# Altium PCB Flight_sensor.PcbDoc
Units mil, origin at the board's own origin, x right, y up, seen from the top; angles counter-clockwise.
Board outline 6000 x 4000 mil, 2 copper layers (Top Layer, Bottom Layer); 73 components, 80 nets, 324 pads, 77 vias.
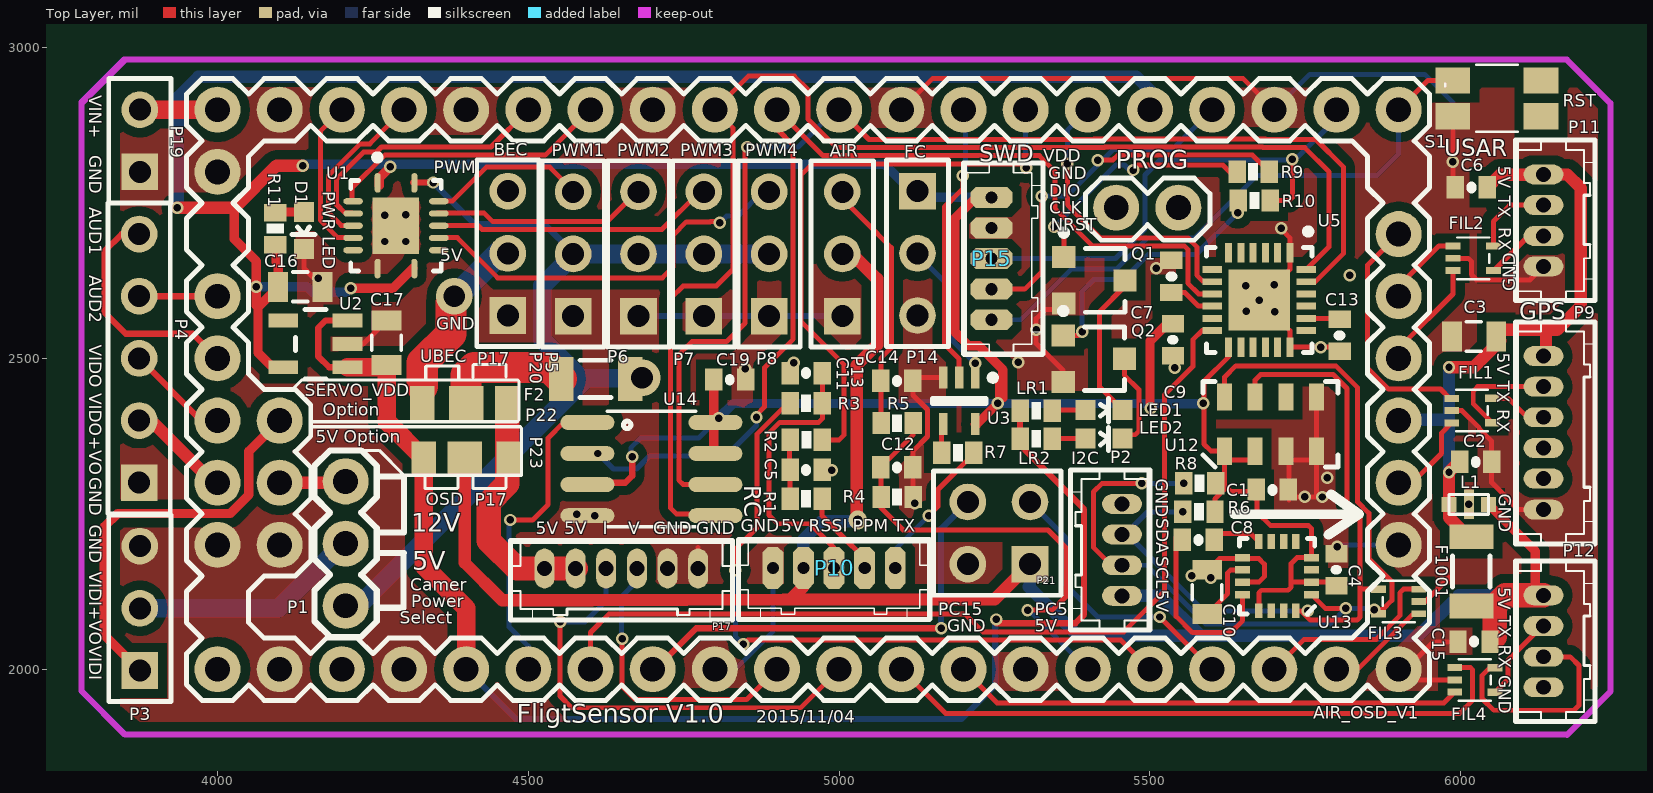
[diagram p0: Top Layer view]
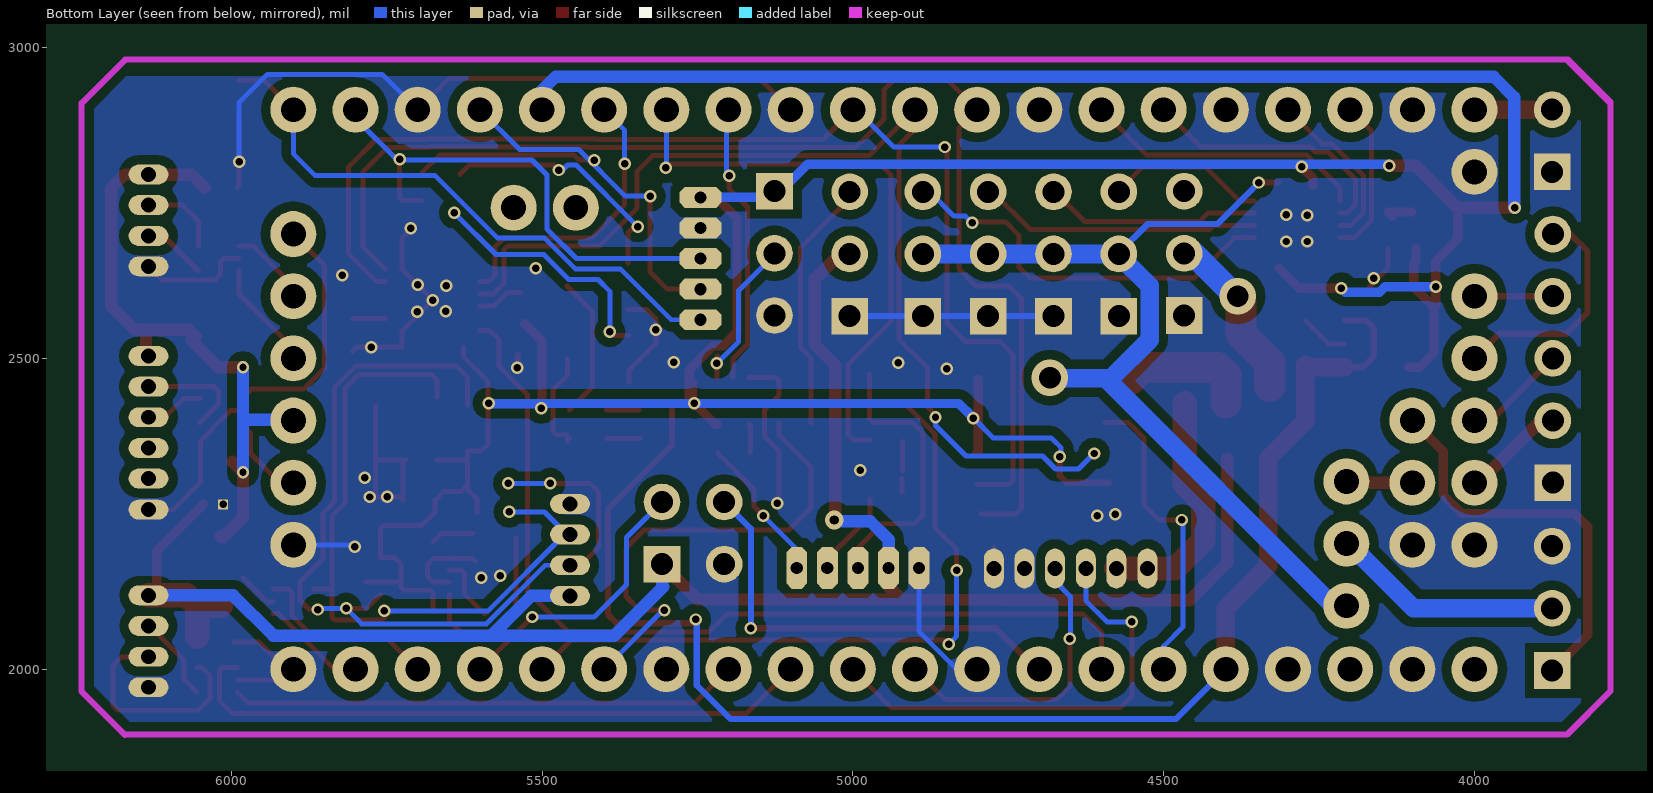
[diagram p1: Bottom Layer view, seen from below]

## Layer stack, top to bottom
Top Layer: signal copper 1.4
Dielectric: dielectric 12.6, FR-4, Dk 4.8
Bottom Layer: signal copper 1.4

## Board outline
2085,1010 8085,1010 8085,5010 2085,5010

## Design rules (kind name [scope] priority, off if disabled: settings)
Clearance Clearance_1 [InPolygon] p1: gap=15
Clearance [All] p2: gap=5
ComponentClearance [All] p1 off: gap=10 collisioncheckmode=3 verticalgap=10 showdistances=FALSE
MinimumSolderMaskSliver [All] p1 off: minsoldermaskwidth=10
PlaneConnect [All] p1: planeconnectstyle=Direct reliefexpansion=20 reliefentries=4 reliefconductorwidth=10 reliefairgap=10
PolygonConnect [All] p1: connectstyle=Direct reliefconductorwidth=10 reliefentries=4 polygonreliefangle="90 Angle"
RoutingVias [All] p1: holewidth=28 width=50 viastyle="Through Hole" minholewidth=28 minwidth=50 maxholewidth=28 maxwidth=50
SilkToSilkClearance [All] p1 off: silktosilkclearance=10
SilkscreenOverComponentPads [All] p1 off: minsilkscreentomaskgap=10
SolderMaskExpansion [All] p1: expansion=4
TestPointUsage [All] p1: valid=0 allowmultiple=FALSE
Testpoint [All] p1: side=15 testpointundercomponent=TRUE minsize=40 maxsize=100 preferedsize=60 minholesize=0 maxholesize=40 preferedholesize=32 testpointgrid=1 style=1023 order=0123456789
Width [All] p1: maxlimit=100 minlimit=5 preferedwidth=7
19 further rules are at their usual default settings.

## Components (designator, comment, footprint, x,y, rotation, side; value= is the part's Value field where it differs from the comment)
AIR_OSD_V1 "AIR_OSD_V1" AIR_OSD_CON 4000,2000 r0 top locked
C1 "100nF" 0402-CAP 5697,2289 r180 top
C2 "10nf" 0402-CAP 6024,2334 r180 top
C3 "10uf" 0805 6021,2535 r0 top
C4 "100nF" 0402-CAP 5800,2160 r90 top
C5 "10nf" 0402-CAP 4947,2321 r180 top
C6 "10nf" 0402-CAP 6017,2775 r180 top
C7 "100nF" 0402-CAP 5534,2632 r270 top
C8 "220nF" 0402-CAP 5578,2208 r180 top
C9 "100nF" 0402-CAP 5537,2530 r90 top
C10 "4.7uF" 0805 5592,2124 r90 top
C11 "10nf" 0402-CAP 4946.99,2476 r0 top
C12 "10nf" 0402-CAP 5093,2325 r180 top
C13 "100nF" 0402-CAP 5805,2537 r90 top
C14 "10nf" 0402-CAP 5093,2464 r180 top
C15 "100nF" 0402-CAP 6021,2044 r0 top
C16 "4.7UF" 0805 4133,2615 r0 top
C17 "1uF" 0805 4272,2525 r90 top
C19 "100nF" 0402-CAP 4824,2466 r180 top
D1 "BLUE-C" LED-0603 4139,2706 r180 top (schematic designator LED1)
F2 "0ZCA0035FF2G" PTC-1206 4608,2467 r0 top (schematic designator F1001)
F1001 "0ZCA0035FF2G" PTC-1206 6017,2157 r90 top
FIL1 "IP4256CZ5-W,115" SOT-665 6018,2416 r0 top
FIL2 "IP4256CZ5-W,115" SOT-665 6020,2661 r0 top
FIL3 "IP4256CZ5-W,115" SOT-665 5900,2109 r180 top
FIL4 "IP4256CZ5-W,115" SOT-665 6022.57,1982.87 r0 top
L1 "KNH16C104DA5TS" KYOCERA-KNH16-DA 6013,2265.25 r180 top
LED1 "BLUE-C" LED-0603 5426,2417 r270 top
LED2 "BLUE-C" LED-0603 5426,2371 r270 top
LR1 "470" 0402-RES 5317,2416 r180 top
LR2 "470" 0402-RES 5317,2371 r180 top
P1 "Camera Power Switch" 3X1-NS 4206,2202 r90 top
P2 "DF13-4P-1.25DSA" DF13-4P-1.25DSA 5455,2191.82 r90 top
P3 "Camera Connect" HDR1X3 3875,1998 r90 top
P4 "Wreless _Video" HDR1X5 3874,2300 r90 top
P5 "Header 3" HDR1X3 4572.1,2568 r90 top
P6 "Header 3" HDR1X3 4677.2,2568 r90 top
P7 "Header 3" HDR1X3 4782.3,2568 r90 top
P8 "Header 3" HDR1X3 4887.4,2568 r90 top
P9 "GPS/DF13-6P-1.25DSA" PIXHAWK2_DF13-6P-1.25DSA 6133,2380.7 r270 top
P10 "CONN_5" DF13-5P-1.25DSA 4991.79,2163 r180 top
P11 "Console/DF13-4P-1.25DSA" DF13-4P-1.25DSA 6133,2722 r270 top
P12 "console" DF13-4P-1.25DSA 6133,2045 r270 top
P13 "CONN_3" HDR1X3 5005,2568 r90 top
P14 "Header 3" HDR1X3 5126,2769 r270 top
P15 "SWD" DF13-5P-1.25DSA 5245,2660.58 r270 top
P17 "DF13-6P-1.25DSA" PIXHAWK2_DF13-6P-1.25DSA 4650.18,2162 r180 top
P19 "Header 2" HDR1X2 3875,2800 r90 top
P20 "Header 3" HDR1X3 4467,2569 r90 top
P21 "DF13-4P-1.25DSA" HDR1X4 5007,2169 r180 top
P22 "Header 3" 0402-S 4397.7,2428 r0 top
P23 "Header 3" 0402-S 4400,2339 r180 top
Q1 "2N7002" 2N7002 5411,2627 r270 top
Q2 "2N7002" 2N7002 5410,2501 r270 top
R1 "100" 0402-RES 4947,2274 r180 top
R2 "1K" 0402-RES 4946.99,2369 r0 top
R3 "100" 0402-RES 4947,2428 r180 top
R4 "33K" 0402-RES 5092.99,2277 r0 top
R5 "17K" 0402-RES 5093,2396 r0 top
R6 "4.7K" 0402-RES 5579,2253 r180 top
R7 "100" 0402-RES 5191,2348 r180 top
R8 "4.7K" 0402-RES 5580,2299 r180 top
R9 "1K" 0402-RES 5666,2800 r0 top
R10 "1K" 0402-RES 5668,2754 r180 top
R11 "470" 0402-RES 4093,2709 r270 top
S1 "RESET" EVQP7J01K 6058,2918 r0 top
U1 "TXB0104GRYQFN" RGY(S-PVQFN-N14) 4287.1,2713.37 r270 top
U2 "MIC5219-3.3V" SOT23-5 4157.81,2523 r90 top
U3 "sn74lvc1g86" "DCK (R-PDSO-G5)" 5193,2431.6 r270 top
U5 "MPU-6000" MPU6000 5675.79,2593.84 r270 top
U12 "MS5611-01BA" MS5611-01BA 5694,2394 r90 top
U13 "HMC5883L" LPCC16 5705,2150 r180 top
U14 "FM25V01" SO08 4698,2322 r270 top

## Footprints (in the part's own frame and the unit in brackets; to place one, negate y for a bottom-side part, rotate by r counter-clockwise, add the part's x,y. Pads: shape width x height; smd on the part's side, far side on the other; paste and mask are expansions set on the pad)
2N7002 [mm]
  rect 0.9x0.95 smd: 1(-0.909,-1.259) 2(0.041,1.241) 3(0.991,-1.259)
  silkscreen extent -2.03,-1.38 1.34,1.24
3X1-NS [mil] "2X3-NS"
  round 74 hole 40: 1(-100,0) 2(0,0) 3(100,0)
  silkscreen extent -150,-50 150,50
0402-CAP [mil] "0402-CAP"
  rect 28x36 smd: 1(-25.59,0) 2(26,0)
  silkscreen extent 0,-1 0,2
0402-RES [mil] "0402-RES"
  rect 28x36 smd: 1(-25.59,0) 2(26,0)
  silkscreen extent -8,-14 8,14
0402-S [mm] "0402-CAP"
  rect 1x1.4 smd: 1(-1.735,0) 3(1.735,0)
  rect 1.4x1.4 smd: 2(0.058,0)
0805 [mil] "0805"
  rect 32x48 smd: 1(-35.43,0) 2(36,0)
  silkscreen extent -12,-24 12,24
AIR_OSD_CON [mil] "100MIL"
  round 74 hole 40: 1(0,0) 2(100,0) 3(200,0) 4(300,0) 5(400,0) 6(500,0) 7(600,0) 8(700,0) 9(800,0) 10(900,0) 11(1000,0) 12(1100,0) 13(1200,0) 14(1300,0) 15(1400,0) 16(1500,0) 17(1600,0) 18(1700,0) 19(1800,0) 20(1900,0) 21(1900,200) 22(1900,300) 23(1900,400) 24(1900,500) 25(1900,600) 26(1900,700) 27(1900,900) 28(1800,900) 29(1700,900) 30(1600,900) 31(1500,900) 32(1400,900) 33(1300,900) 34(1200,900) 35(1100,900) 36(1000,900) 37(900,900) 38(800,900) 39(700,900) 40(600,900) 41(500,900) 42(400,900) 43(300,900) 44(200,900) 45(100,900) 46(0,900) 47(0,800) 48(0,600) 49(0,500) 50(0,400) 51(0,300) 52(0,200) 53(100,400) 54(100,300) 55(100,200) 56(1445.67,742.52) 57(1545.67,742.52)
  silkscreen extent -50,-50 1950,950
"DCK (R-PDSO-G5)" [mm] "sn74lvclg86"
  rect 0.9x0.35 smd: 1(-0.95,0.65) 2(-0.95,0) 3(-0.95,-0.65) 4(0.95,-0.65) 5(0.95,0.65)
  silkscreen extent -1.07,-1.1 0.1,1.5, body extent -0.7,-1.07 0.7,1.08, height 1.1
DF13-4P-1.25DSA [mil] "DF13-4P-1.25DSA"
  oval 32x64 hole 24: 1(-73.82,0) 2(-24.61,0) 3(25,0) 4(74,0)
  silkscreen extent -132,-47 132,84
DF13-5P-1.25DSA [mm]
  oct 0.856x1.711 hole 0.5: 1(-2.5,0) 2(-1.25,0) 3(0,0) 4(1.25,0) 5(2.5,0)
  silkscreen extent -3.97,-1.2 3.98,2.13
EVQP7J01K [mil] "EVQP7J01K"
  rect 56x42 smd: A1(-70.87,29) A2(71,29) B3(-70.87,-28.54) B4(71,-28.54)
  silkscreen extent -83,-53 34,54
HDR1X2 [mm] "Connector; Header; 2 Position"
  rect 1.5x1.5 hole 0.9: 1(0,0)
  round 1.5 hole 0.9: 2(2.54,0)
  silkscreen extent -1.27,-1.27 3.81,1.27
HDR1X3 [mm] "Connector; Header; 3 Position"
  rect 1.5x1.5 hole 0.9: 1(0,0)
  round 1.5 hole 0.9: 2(2.54,0) 3(5.08,0)
  silkscreen extent -1.27,-1.27 6.35,1.27
HDR1X4 [mm] "Connector; Header; 5 Position"
  rect 1.5x1.5 hole 0.9: 1(-7.62,0)
  round 1.5 hole 0.9: 2(-5.08,0) 3(-7.62,-2.54) 4(-5.08,-2.54)
  silkscreen extent -8.89,-3.81 -3.68,1.27
HDR1X5 [mm] "Connector; Header; 5 Position"
  rect 1.5x1.5 hole 0.9: 1(0,0)
  round 1.5 hole 0.9: 2(2.54,0) 3(5.08,0) 4(7.62,0) 5(10.16,0)
  silkscreen extent -1.27,-1.27 11.43,1.27
KYOCERA-KNH16-DA [mil] "KYOCERA-KNH16-DA"
  rect 24x24 smd: P$1(-31.5,0) P$2(32,0)
  rect 16x16 smd: P$3(0,-15.75) P$4(0,16)
  rect 16x16 hole 12: P$5(0,0)
  silkscreen extent -31,-16 32,16
LED-0603 [mil] "LED-0603"
  rect 32x32 smd: A(0,-29.53) C(0,30)
  silkscreen extent -18,-6 19,7
LPCC16 [mil] "LPCC16"
  rect 24x12 smd: 1(-55.12,30) 2(-55.12,10) 3(-55.12,-9.84) 4(-55.12,-29.53) 9(56,-29.53) 10(56,-9.84) 11(56,10) 12(56,30)
  rect 12x24 smd: 5(-29.53,-55.12) 6(-9.84,-55.12) 7(10,-55.12) 8(30,-55.12) 13(30,56) 14(10,56) 15(-9.84,56) 16(-29.53,56)
  silkscreen extent -60,-60 61,61
MPU6000 [mm] "QFN, 24"
  rect 0.8x0.28 smd: 1(-1.925,1.25) 2(-1.925,0.75) 3(-1.925,0.25) 4(-1.925,-0.25) 5(-1.925,-0.75) 6(-1.925,-1.25) 13(1.925,-1.25) 14(1.925,-0.75) 15(1.925,-0.25) 16(1.925,0.25) 17(1.925,0.75) 18(1.925,1.25)
  rect 0.28x0.8 smd: 7(-1.25,-1.925) 8(-0.75,-1.925) 9(-0.25,-1.925) 10(0.25,-1.925) 11(0.75,-1.925) 12(1.25,-1.925) 19(1.25,1.925) 20(0.75,1.925) 21(0.25,1.925) 22(-0.25,1.925) 23(-0.75,1.925) 24(-1.25,1.925)
  rect 2.5x2.5 smd: 25(0,0)
  silkscreen extent -2.92,-2.15 2.15,2.15, body extent -2,-2 2,2, height 0.95
MS5611-01BA [mil] "MS5611-01BA"
  rect 44x24 smd: 1(-43.31,74) 2(-43.31,25) 3(-43.31,-24.61) 4(-43.31,-73.82) 5(44,-73.82) 6(44,-24.61) 7(44,25) 8(44,74)
  silkscreen extent -69,-108 69,109
PIXHAWK2_DF13-6P-1.25DSA [mil] "PIXHAWK2_DF13-6P-1.25DSA"
  oval 32x64 hole 24: 1(-123.03,0) 2(-73.82,0) 3(-24.61,0) 4(25,0) 5(74,0) 6(124,0)
  silkscreen extent -181,-47 182,84
PTC-1206 [mil] "PTC-1206"
  rect 40x71 smd: 1(-55.12,0) 2(56,0)
  silkscreen extent -25,-30 25,30
RGY(S-PVQFN-N14) [mm] "QFN, 14-Leads, Body 3.7x3.7mm (max), Pitch 0.50mm, Pitch1 1.50mm, IPC Medium Density"
  oval 0.8x0.25 smd: 1(-1.75,-0.75) 7(1.75,-0.75) 8(1.75,0.75) 14(-1.75,0.75)
  oval 0.25x0.8 smd: 2(-1,-1.75) 3(-0.5,-1.75) 4(0,-1.75) 5(0.5,-1.75) 6(1,-1.75) 9(1,1.75) 10(0.5,1.75) 11(0,1.75) 12(-0.5,1.75) 13(-1,1.75)
  rect 2.3x1.9 smd: 15(0,0)
  silkscreen extent -2.92,-1.85 1.85,1.85, body extent -1.83,-1.83 1.83,1.83, height 1
SO08 [mil] "SO08"
  oval 24x87 smd: 1(-75,-103) 2(-25,-103) 3(25,-103) 4(75,-103) 5(75,103) 6(25,103) 7(-25,103) 8(-75,103)
  silkscreen extent -93,-71 93,71
SOT23-5 [mil] "SOT23-5"
  rect 22x48 smd: 1(-37.4,-51.19) 2(0,-51.19) 3(38,-51.19) 4(38,52) 5(-37.4,52)
  silkscreen extent -56,-17 56,32
SOT-665 [mm] "NXP SOT665"
  rect 0.6x0.28 smd mask+0.076: 1(-0.825,0.5) 2(-0.825,0) 3(-0.825,-0.5)
  rect 0.6x0.3 smd mask+0.076: 4(0.825,-0.5) 5(0.825,0.5)
  silkscreen extent -0.65,-0.85 0.65,0.85, body extent -0.65,-0.85 0.65,0.85, height 0.6

## Part data
AIR_OSD_V1: library part Component_1
C1 C4 C7 C8 C9 C13 C16 C17: library part CAP0402-CAP
C2 C3 C5 C6 C11 C12 C14 C15: library part Cap, "Capacitor"
C10: library part CAP0805
C19: library part CAP0402, "<b>Capacitor</b> / Standard 0603 ceramic capacitor, and 0.1\" leaded capacitor."
D1 LED1 LED2: library part LED
F2 F1001: library part PTCSMD, "<b>Resettable Fuse PTC</b> / Resettable Fuse. Spark Fun Electronics SKU : COM-08357"
FIL1 FIL2 FIL3 FIL4: library part "RF Filter 100R 30pF", "IP4256CZ5-W,115 2 channel, 100R, 30pF, RF ESD Filter"
L1: "Kyocera KNH16C104DA5TS EMI filter"
LR1 LR2 R1 R2 R3 R4 R5 R6 R7 R8 R9 R10 R11: library part Res1, "Resistor"
P1 P3 P4 P13: library part "Header 3", "Header, 3-Pin"
P2 P11 P12: library part "Header 4", "Header, 4-Pin"
P5 P6 P7 P8 P14 P20 P22 P23: "Header, 3-Pin"
P9 P17: library part "Header 6", "Header, 6-Pin"
P10 P15: library part "Header 5", "Header, 5-Pin"
P19: "接插件"
Q1 Q2: library part IRF840, "CQ-IRF840"
S1: library part SW-PB, "Switch"
U1: library part TXB0104UQFN
U2: library part V_REG_LDOSMD
U3: library part 74LS86
U5: library part MPU-3000
U14: "<b>FM25V01 128Kb Serial 3V F-RAM Memory</b>"

## Via types
v1: diameter 20, hole 12, Top Layer to Bottom Layer, 74 vias
v2: diameter 59, hole 35, Top Layer to Bottom Layer, 2 vias
v3: diameter 30, hole 15, Top Layer to Bottom Layer, 1 vias

## Nets (pads, with @x,y where several pads share a name; then routed paths per layer and width w, separated by ;. In a path a pad name is that pad's centre, name@x,y a point inside that pad or via, vN(x,y) a via of type N, cw(c..) or ccw(c..) an arc to the next point about the centre after c; other vN are vias at no path point)
5-9V_EXTERNAL: P20.2 P22.1 | length 268.8
  Top Layer w50: P22.1@4329.41,2455 4329.41,2493.41 4375.3,2539.3 v2@4375.3,2590.18
  Bottom Layer w39.37: v2(4381,2600) 4384,2600 4453,2669 P20.2
5V_SERVO: F2.2 P1.1 P5.2 P6.2 P7.2 P8.2 U1.14 | length 1494.1
  Top Layer w10: U1.14@4314.53,2782.9 v1(4346.9,2782.9)
  Bottom Layer w10: v1(4346.9,2782.9) 4413.8,2716 4526,2716 P5.2@4573.05,2668.95
  Bottom Layer w30: P1.1 4209,2105 4230,2105 4593,2468 ; P5.2 4572.1,2666.1 4522.57,2616.57 4522.57,2598.67 4522.57,2530.19 4584.76,2468 4593,2468 ; P5.2@4574,2668 P6.2 ; v2(4683,2469) 4682,2468 4593,2468 ; P6.2@4685.8,2668 4786.6,2668 P8.2
+3.3V: AIR_OSD_V1.31 C1.2 C4.1 C9.2 C16.1 C19.2 P14.1 P15.1 R6.1 R8.1 R11.2 U1.1 U1.8 U2.5 U3.5 U5.13 U12.1 U12.2 U13.2 U13.4 U13.13 U14.3 U14.7 U14.8 | length 6520
  Top Layer w8: v1(5255,2428) 5255,2463 ; R6.1@5604.59,2252 5604.59,2274 5620,2289.41 5620,2296 ; U5.13 5626.57,2502.57 5587,2463 5587,2362 5598.31,2350.69 U12.1 U12.1@5620,2336.69 ; U12.2@5669,2336.69 U12.1@5620,2336.69 ; U13.13 5675,2123 5679,2127 5722,2127 5727,2132 5727,2140 ; C4.1@5783.59,2140 U13.2 5727,2140 ; 5620,2296 U12.1@5620,2336.69 ; 5620,2296 5630,2286 5658,2286 5672,2272 5672,2253 5694,2231 5755.12,2231 5760.12,2226 U13.4 5736.53,2179.53 5727,2170 5727,2140
  Top Layer w10: U14.3@4588,2300 4656,2300 4667,2311 v1(4667,2342)
  Top Layer w15: 4027,2742 4027,2692 4062.5,2656.5 v1(4062.5,2615) 4062.5,2584.93 4065,2582.43 ; R11.2@4094,2677 4094,2655 4097.57,2651.43 C16.1 4065,2582.43 ; U2.5 4088.4,2485.6 4065,2509 4065,2582.43 ; v1(4137,2810) v1@4139,2808 ; v1(4214,2613) 4282.43,2613 U1.8@4314.53,2645.1 ; U1.1@4260,2778 4260,2790 v1(4278,2808) ; U14.7@4798,2349 C19.2 ; U14.7@4799,2349 U14.7 ; U3.5 5221.2,2394.2 v1(5255,2428) ; P15.1 5239,2765 5226,2765 5186.43,2725.43 5186.43,2542.57 5208.5,2520.5 5224.83,2520.5 5263.41,2481.93 5263.41,2463 5263.41,2436.41 ; v1@5500,2428 5500,2528 C9.2@5528,2556
  Top Layer w20: v1(3935,2742) 4027,2742 4095,2810 v1(4137,2810)
  Bottom Layer w8: v1(4667,2342) 4665,2344 4665,2356 4681,2372 4774,2372 v1(4806,2404)
  Bottom Layer w15: v1(4062.5,2615) 4144.18,2615 4152.68,2606.5 4207.5,2606.5 v1(4214,2613) ; v1(4137,2810) 4137,2812 4137.5,2812.5 5072.5,2812.5 5126,2759 P15.1 ; v1(4806,2404) 4829.5,2427.5 5499.5,2427.5 v1@5501,2426 ; v1@5501,2427 v1@5586,2427
  Bottom Layer w20: v1(3935,2742) 3936,2743 3936,2920 3969,2953 5478,2953 5500,2931 AIR_OSD_V1.31
  other v1: 5501,2420 5586,2428
+5V: C15.2 F1001.1 L1.P$1 P2.1 P10.4 P12.1 P13.2 P21.1 P23.2 | length 3249.7
  Top Layer w15: L1.P$1 6120,2189.75 6120,2131.82 P12.1
  Top Layer w20: P23.2 4397.7,2171.3 4457.89,2111.11 4601.91,2111.11 ; 4569,2111 4601.91,2111.11 ; 4921.88,2112.18 P10.4@4942.57,2133 ; P13.2@4994,2668 5021,2668 5061,2628 5061,2521.95 5028,2488.95 v3@5028,2240 ; P21.1 5250.14,2112.14 4910.65,2112.14 4601.91,2111.11
  Top Layer w39.37: F1001.1 6054.88,2101.88 ; C15.2@6054.88,2051.88 6054.88,2101.88 ; P12.1 6071.82,2118.82 6054.88,2101.88
  Bottom Layer w20: P10.4 4942.57,2208.57 4972,2238 5029,2238 5030,2239 v3(5030,2240) ; 5304.82,2132.82 5383.64,2054 5932,2054 5996.82,2118.82 P12.1 ; 5307,2135 P21.1 ; P2.1 5517.36,2118 5581,2054.36
ADC_I: AIR_OSD_V1.11 P17.4 | length 741.7
  Top Layer w8: v1(4551,2076) 4551,1957 4570,1938 4938,1938 AIR_OSD_V1.11
  Bottom Layer w8: v1(4551,2076) 4591,2076 4625.18,2110.18 P17.4
ADC_RSSI: AIR_OSD_V1.16 R3.2 | length 1109.8
  Top Layer w8: v1(4833,2159) 4833,2193 4868,2228 4868,2378.71 4917.29,2428 R3.2 ; v1@4847,2041 4853,2047 5453,2047 AIR_OSD_V1.16
  Bottom Layer w8: v1(4833,2159) 4833,2053 v1(4846,2040) ; AIR_OSD_V1.16@5498,1998 AIR_OSD_V1.16
ADC_V: AIR_OSD_V1.10 P17.3 | length 478.7
  Top Layer w8: v1(4651,2049) 4651,1972 4672,1951 4851,1951 AIR_OSD_V1.10
  Bottom Layer w8: v1(4651,2049) 4650,2050 4650,2117 4674.79,2141.79 P17.3
AIR_SPD: AIR_OSD_V1.15 C12.2 R4.1 R5.2 | length 767.2
  Top Layer w8: R4.1@5067,2277 C12.2 5119,2377 R5.2 ; R4.1 5067.4,2259.6 5103,2224 5336,2224 5365,2195 5365,2117 5343,2095 v1(5303,2095)
  Bottom Layer w8: v1@5304,2096 AIR_OSD_V1.15
AUDIO_1: AIR_OSD_V1.49 P4.5 | length 378.2
  Top Layer w10: P4.5 3846,2700 3818,2672 3818,2574 3852.47,2539.53 3960.47,2539.53 AIR_OSD_V1.49
AUDIO_2: AIR_OSD_V1.48 P4.4 | length 126
  Top Layer w10: P4.4 AIR_OSD_V1.48
BOARDVIN+: AIR_OSD_V1.3
CAMERA_POWER: P1.2 P3.2 | length 368.7
  Bottom Layer w30: P3.2 4098,2098 P1.2@4201,2201
EXIT1: AIR_OSD_V1.7 U5.12 | length 1494.5
  Top Layer w8: AIR_OSD_V1.7 4600,2059 4630,2089 5202,2089 5231,2060 5458,2060 5523,2125 5523,2441 5569,2487 5569,2530 5583.63,2544.63 U5.12
F\R\A\M\_\C\S\: AIR_OSD_V1.6 U14.1 | length 532.5
  Top Layer w8: v1(4471.07,2240.07) 4507.07,2240.07 4532,2265 4532,2372 4557,2397 U14.1
  Bottom Layer w8: v1@4469,2240.07 4469,2068.09 4500,2037.09 AIR_OSD_V1.6 AIR_OSD_V1.6@4500,2028
FC_TX_RC: P10.1 R7.1 | length 263.7
  Top Layer w8: P10.1 P10.1@5090.21,2189.4 ; v1(5144,2247) 5159,2262 5159,2289 5216.59,2346.59 R7.1
  Bottom Layer w8: P10.1 5090.21,2193.21 v1(5144,2247)
FSYNC: U5.11
GND: AIR_OSD_V1.2 AIR_OSD_V1.4 AIR_OSD_V1.9 AIR_OSD_V1.14 AIR_OSD_V1.20 AIR_OSD_V1.21 AIR_OSD_V1.29 AIR_OSD_V1.35 AIR_OSD_V1.39 AIR_OSD_V1.42 AIR_OSD_V1.45 AIR_OSD_V1.47 AIR_OSD_V1.52 AIR_OSD_V1.55 C1.1 C2.1 C3.1 C4.2 C5.1 C6.2 C7.1 C9.1 C10.2 C11.1 C12.1 C13.1 C14.1 C15.1 C16.2 C17.2 C19.1 D1.C FIL1.2 FIL2.2 FIL3.2 FIL4.2 L1.P$3 L1.P$4 L1.P$5 P2.4 P3.3 P4.1 P5.1 P6.1 P7.1 P8.1 P9.6 P10.5 P11.4 P12.4 P13.1 P14.3 P15.2 P17.1 P17.2 P19.1 P20.1 P21.2 Q1.3 Q2.3 R4.2 S1.B3 U1.7 U1.15 U2.2 U3.3 U5.1 U5.18 U5.25 U12.3 U12.4 U12.5 U13.9 U13.11 U14.4 | length 3901.6
  Top Layer w8: D1.C 4139,2645 C16.2 ; U2.2 4234,2523 C17.2 ; P17.1 4773.21,2195.79 ; AIR_OSD_V1.35 5150,2950 5650,2950 AIR_OSD_V1.29 ; R4.2@5118.59,2277.4 C12.1 5118.59,2350.86 5142,2374.27 5142,2417.73 5118.59,2441.14 C14.1 5123.59,2469 U3.3 ; Q2.3 5360.44,2480.56 5317,2524 v1(5317,2546) 5317,2550 5317,2564 5332,2579 Q1.3@5361.44,2579 ; C10.2@5607,2173 5612,2178 U13.9@5647.47,2178 ; U13.11 5675,2140 5684,2149 5684,2158 5684,2169 5675,2178 U13.9@5647.47,2178 ; U13.9 U13.9@5647.47,2178 ; v1@5713,2706 5725,2694 U5.1 5725,2643.06 v1(5675.79,2593.84) 5725,2544.63 U5.18 v1(5775,2518.06) 5798.35,2518.06 C13.1 ; U12.3@5718.61,2336.69 U12.4@5767.82,2336.69 ; C1.1@5723.59,2272 U12.3@5723.59,2331.71 ; C1.1@5728.77,2277.18 5767.82,2277.18 U12.4@5767.82,2336.69 ; U12.5@5767.82,2424 U12.4@5767.82,2336.69 ; AIR_OSD_V1.20 5917.13,1982.87 FIL4.2 ; AIR_OSD_V1.21 AIR_OSD_V1.21@5904,2204 ; AIR_OSD_V1.20@5907,1995 5956,2044 C15.1 ; FIL3.2 5933.48,2108 5941.85,2108 5981.41,2147.56 ; FIL1.2 6002,2416 6029.67,2388.33 6029.67,2386.68 6049.59,2366.76 C2.1 6049.59,2300.41 6093.3,2256.7 P9.6 ; S1.B3 v1(5987.13,2816) 5987.13,2778.87 C6.2 ; FIL2.2 6012,2661 6017,2656 6017,2635 6025.59,2626.41 6111.41,2626.41 P11.4
  Top Layer w10: C9.1@5539,2505.41 5539,2486 v1(5540,2485)
  Bottom Layer w8: AIR_OSD_V1.9 4832.87,2000 4893.36,2060.49 P10.5 ; AIR_OSD_V1.29 5757,2957 5942,2957 5987.13,2911.87 v1(5987.13,2816) ; v1@5805,2200 AIR_OSD_V1.21
  Bottom Layer w10: P6.1@4683,2568 4783,2568 4886,2568 P13.1@4985,2568
  other v1: 5598,2147 5567,2150 5801,2197 4607,2247 4578,2249 5121.59,2267 5749,2277.18 5777,2277 5785,2308 4988,2320 4849,2483 4927,2493 5288,2494 5701,2575 5655,2576 5654,2617 5700.15,2618.2 4162,2629 5821,2634 5510,2645 4269,2688 4303,2688 5711,2709 4269,2730 4303,2731
JP_VCC: P17.5 P17.6 P22.3 P23.1 | length 392.2
  Top Layer w39.37: P22.3 4466,2298 4436,2268 4436,2207 4481,2162 P17.6 P17.5
LED2: AIR_OSD_V1.30 P15.4 R9.2 | length 836.5
  Top Layer w8: P15.4 5298.36,2611.36 5326,2639 v1(5326,2761) ; v1(5416,2819) 5440.13,2819 5448.13,2827 5665,2827 R9.2
  Bottom Layer w8: v1(5326,2761) 5366,2761 5441,2836 5536,2836 AIR_OSD_V1.30
LED3: AIR_OSD_V1.28 P15.3 R10.1 | length 818.6
  Top Layer w8: R10.1 5724,2754 5729,2759 5729,2824.09 v1@5730.91,2826
  Bottom Layer w8: P15.3 5444.58,2660.58 5492,2708 5492,2795 5516,2819 5733,2819 5800,2886 AIR_OSD_V1.28
  other v1: 5729,2820
MAINBOARD_5V: AIR_OSD_V1.5 C17.1 LR1.2 LR2.2 P23.3 U2.1 U2.3 | length 2289.4
  Top Layer w10: U2.1 4179.4,2485.6 4162,2503 4162,2549 4174,2561 U2.3 ; v1@5253,2074 5380,2074 5394,2088 5394,2257 5291,2360 LR2.2 LR1.2
  Top Layer w30: U2.1 4268.03,2485.6 C17.1 4272,2398.7 P23.3 4331.7,2166.3 4400,2098 AIR_OSD_V1.5
  Bottom Layer w10: AIR_OSD_V1.5 4480,1920 5197,1920 5251,1974 v1@5251,2080
  other v1: 5253,2080
MAINBOARD_VIDEOOUT1: AIR_OSD_V1.54 P1.3 | length 107.4
  Top Layer w20: AIR_OSD_V1.54@4101,2301 AIR_OSD_V1.54 P1.3@4206,2300
MAINBOARD_VIDEOOUT2: AIR_OSD_V1.51 P4.2 | length 198.4
  Top Layer w10: AIR_OSD_V1.51 AIR_OSD_V1.51@4000,2331
  Top Layer w20: P4.2 3893,2400 3993,2300 AIR_OSD_V1.51
MAINBOARD_VIN+: AIR_OSD_V1.1
NetAIR_OSD_V1_23: AIR_OSD_V1.23 C2.2 C3.2 C6.1 F1001.2 L1.P$2 P9.1 P11.1 | length 1173.5
  Top Layer w8: C6.1@6042.77,2774.82 6056.95,2789 P11.1@6156,2789
  Top Layer w20: v1(5981,2486) 6021,2486 C3.2@6063.5,2528.5 ; C2.2 v1(5981,2317) L1.P$2 5981,2244.04 6012.04,2213 F1001.2 ; C6.1 6063.41,2795.82 P11.1 6171.18,2795.82 6193,2774 6193,2584 6154.73,2545.73 6137,2545.73 ; C3.2 6067.73,2545.73 6137,2545.73 ; P9.1 6137,2507.73 6137,2545.73
  Bottom Layer w20: AIR_OSD_V1.23 5901,2401 5981,2401 ; v1(5981,2317) 5981,2401 ; v1(5981,2486) 5981,2401
NetC5_2: C5.2 R1.2 R2.1 | length 70
  Top Layer w8: C5.2@4920,2319 R2.1@4920,2366 ; R1.2@4921,2285 C5.2@4921,2308
NetC7_2: C7.2 U5.10 | length 75.1
  Top Layer w8: C7.2 5556,2606 5578,2584 U5.10
NetC8_1: C8.1 U13.8 | length 69.3
  Top Layer w8: C8.1@5611,2218 5662.12,2218 U13.8
NetC8_2: C8.2 U13.12 | length 294.6
  Top Layer w8: C8.2@5542,2212 5542,2085 5568,2059 5630,2059 5649,2078 U13.12
NetC10_1: C10.1 U13.10 | length 106.3
  Top Layer w8: C10.1 5625,2121.57 5625,2155 5629.84,2159.84 U13.10 U13.10@5648.84,2160
NetC13_2: C13.2 U5.20 | length 54
  Top Layer w8: U5.20 5803.69,2564.31 C13.2
NetD1_A: D1.A R11.1 | length 47.9
  Top Layer w15: R11.1@4100.94,2735.53 D1.A D1.A@4132.06,2728.59
NetF2_1: F2.1 P22.2 | length 210.8
  Top Layer w50: P22.2 4400,2473 4412.56,2485.56 4534.32,2485.56 F2.1
NetFIL1_4: FIL1.4 P9.2 | length 179.6
  Top Layer w8: FIL1.4 6020,2426.8 6020,2447.33 6027.19,2454.52 P9.2
NetFIL1_5: FIL1.5 P9.3 | length 95.1
  Top Layer w8: FIL1.5 6076.31,2435.68 6106.7,2405.3 P9.3
NetFIL2_4: FIL2.4 P11.3 | length 103.6
  Top Layer w8: FIL2.4 6053.31,2641.32 6109,2697 P11.3
NetFIL2_5: FIL2.5 P11.2 | length 131.1
  Top Layer w8: FIL2.5 6052.48,2720.48 6078.61,2746.61 P11.2
NetFIL4_4: FIL4.4 P12.2 | length 139.7
  Top Layer w8: FIL4.4 6075.86,1983.99 6075.86,2014.22 6131.25,2069.61 P12.2
NetFIL4_5: FIL4.5 P12.3 | length 357
  Top Layer w8: FIL4.5 6046.55,2002.55 6034.24,1990.24 6034.24,1953.55 6035,1952.79 6035,1952 6053,1934 6182,1934 6190,1942 6190,2006 6176,2020 P12.3
NetLED1_A: LED1.A LR1.1 | length 52.9
  Top Layer w8: LR1.1@5343.59,2417 LED1.A
NetLED1_C: LED1.C Q1.2 | length 231.7
  Top Layer w8: LED1.C 5419,2454 5419,2575.54 Q1.2@5459.86,2616.4
NetLED2_A: LED2.A LR2.1 | length 53.9
  Top Layer w8: LR2.1 LED2.A
NetLED2_C: LED2.C Q2.2 | length 168
  Top Layer w8: LED2.C LED2.C@5458.86,2373.86 ; LED2.C@5458.86,2366.14 LED2.C@5458.86,2373.86 ; LED2.C@5458.86,2377.14 LED2.C@5458.86,2373.86 ; Q2.2 5458.86,2473.14 5482,2450 5482,2383 5476.14,2377.14 5462.14,2377.14 LED2.C@5458.86,2373.86
NetP5_3: P5.3 U1.13 | length 258.9
  Top Layer w8: U1.13@4353.9,2753.37 4378.37,2753.37 4432.53,2807.53 4534.47,2807.53 P5.3@4574,2768
NetP6_3: P6.3 U1.12 | length 346
  Top Layer w8: U1.12@4353.9,2733.68 4428.99,2733.68 4442.14,2720.53 4627.33,2720.53 P6.3@4674.8,2768
NetP7_3: P7.3 U1.11 | length 449.4
  Top Layer w8: U1.11@4353.9,2714 4419,2714 4425.47,2707.53 4715.13,2707.53 P7.3@4775.6,2768
NetP8_3: P8.3 U1.10 | length 637.6
  Top Layer w8: U1.10@4353.9,2694.31 4385.69,2694.31 4450.53,2629.47 4715.47,2629.47 4733,2647 4733,2698.27 4754.26,2719.53 4792.53,2719.53 4793,2720 v1@4808,2720
  Bottom Layer w8: v1(4808,2718) 4819,2729 4837.4,2729 P8.3@4876.4,2768
NetP14_2: P14.2 U3.1 | length 250
  Top Layer w8: 5218,2504 5218.59,2503.41 v1(5218.59,2492) U3.1
  Bottom Layer w8: P14.2@5125,2668 5184,2609 5184,2526.59 v1(5218.59,2492)
NetQ1_1: Q1.1 R9.1 | length 408
  Top Layer w8: v1(5346,2712) 5352,2712 5361.44,2702.56 Q1.1 Q1.1@5361.44,2653.8 ; v1(5473,2803) 5481,2811 5617,2811 R9.1@5632,2796
  Bottom Layer w8: v1(5346,2712) 5445,2811 5459,2811 5467,2803 v1(5473,2803)
NetQ2_1: Q2.1 R10.2 | length 400.3
  Top Layer w8: Q2.1 5384.81,2536.8 v1(5391,2543)
  Bottom Layer w8: v1(5391,2543) 5391,2608 5410,2627 5457,2627 5497,2667 5574,2667 v1(5641,2734)
NetR7_2: R7.2 U3.4 | length 47.2
  Top Layer w8: R7.2 5165,2391.79 U3.4
NRST: AIR_OSD_V1.27 P15.5 S1.A1 | length 943.1
  Top Layer w8: AIR_OSD_V1.27 5947,2947 S1.A1
  Bottom Layer w8: P15.5 5292.15,2562.15 5374,2644 5446.38,2644 5496.38,2694 5572,2694 5672,2794 5865,2794 5900,2829 AIR_OSD_V1.27
PC5: AIR_OSD_V1.17 P21.3 | length 451.3
  Top Layer w8: v1(5516,2084) 5516,2080 5517,2079 5521,2079 AIR_OSD_V1.17
  Bottom Layer w8: P21.3 5364,2212 5364,2136 5416,2084 v1(5516,2084)
PC15: AIR_OSD_V1.8 P21.4 | length 730.5
  Top Layer w10: AIR_OSD_V1.8 4704,2000 4770,2066 v1(5164,2066)
  Bottom Layer w10: AIR_OSD_V1.8 AIR_OSD_V1.8@4713,2013 ; v1(5164,2066) 5164,2226 P21.4
PPM_SUN: AIR_OSD_V1.33 R2.2 | length 950.5
  Top Layer w8: R2.2 5000,2369 5008,2377 5008,2490 4938.93,2559.07 4938.93,2795.31 4956.62,2813 5295,2813 v1(5301,2807)
  Bottom Layer w8: AIR_OSD_V1.33 5300,2808 v1(5301,2807)
RAW_ASPD: C14.2 P13.3 R5.1 | length 416.3
  Top Layer w8: P13.3@4994,2768 5040.18,2721.82 5084,2678 5084,2517 5067,2500 C14.2 ; R5.1 C14.2@5067.41,2464
RAW_PPMSUN: P10.2 R1.1 | length 153.5
  Top Layer w8: R1.1@4972.59,2272.59 R1.1 4972.59,2246.41 5003,2216 ; 4994,2225 5003,2216 ; P10.2 5041,2178 5003,2216
RAW_RC_OUT1: AIR_OSD_V1.40 U1.2 | length 456.7
  Top Layer w8: U1.2@4216.1,2753.37 4216.1,2774.04 4269.06,2827 4527,2827 AIR_OSD_V1.40
RAW_RC_OUT2: AIR_OSD_V1.41 U1.3 | length 426.2
  Top Layer w8: U1.3@4216.1,2733.68 4205.27,2733.68 4191.35,2747.6 4191.35,2788.35 4235,2832 4255.68,2832 4263.68,2840 4440,2840 AIR_OSD_V1.41
RAW_RC_OUT3: AIR_OSD_V1.43 U1.4 | length 271.1
  Top Layer w8: U1.4@4216.1,2714 4199,2714 4178.35,2734.65 4178.35,2793.74 4229.62,2845 4245,2845 AIR_OSD_V1.43
RAW_RC_OUT4: AIR_OSD_V1.44 U1.5 | length 254.4
  Top Layer w8: AIR_OSD_V1.44 4165.35,2865.35 4165.35,2722.26 4193.3,2694.31 U1.5@4216.1,2694.31
RAW_RSSI: C11.2 P10.3 R3.1 | length 459
  Top Layer w8: C11.2 4972.99,2402.99 4967,2397 4904.67,2397 4887,2379.33 4887,2248 4901,2234 4953,2234 4991.79,2195.21 P10.3
RAW_SCL: FIL3.5 P2.2 R8.2 U12.8 U13.1 | length 1501.8
  Top Layer w8: P2.2 5437.79,2167.21 5409,2196 5409,2285 5423,2299 v1(5487,2299) ; U12.8@5620,2424 U12.8 5620,2470 5638,2488 5799,2488 5834,2453 5834,2269 5852,2251 5852,2178 5889,2141 5889,2110.8 5874.2,2096 v1(5861,2096) ; U13.1 5782.12,2098 v1(5815,2098) v1@5817,2096
  Bottom Layer w8: P2.2 5495.01,2167.21 5589.23,2073 5790,2073 v1(5815,2098) 5859,2098 v1(5861,2096) ; v1(5487,2299) v1(5554,2299)
RAW_SCL_MU: AIR_OSD_V1.19 FIL3.1 | length 169.5
  Top Layer w8: AIR_OSD_V1.19 5834.38,2000 5923.7,2089.32 FIL3.1
RAW_SDA: FIL3.4 P2.3 R6.2 U12.7 U13.16 | length 1163.4
  Top Layer w8: U12.7 5669,2465 5678,2474 5794.62,2474 5817,2451.62 5817,2267.62 5838,2246.62 5838,2126 ; U13.16 5743,2094 5758,2079 5833,2079 5838,2084 5838,2126 ; FIL3.4 5840.69,2128.68 5838,2126
  Bottom Layer w8: P2.3 5459.82,2216.82 5496,2253 v1(5553,2253) ; P2.3@5461.18,2216.82 5463.79,2216.82 5586.61,2094 v1(5754,2094)
RAW_SDA_MU: AIR_OSD_V1.18 FIL3.3 | length 308.5
  Top Layer w8: AIR_OSD_V1.18 5748,2048 5864,2048 5902,2086 5902,2123 5907.69,2128.68 FIL3.3 ; AIR_OSD_V1.18@5700,2022 AIR_OSD_V1.18@5701,2022
RXI: AIR_OSD_V1.24 FIL2.3 | length 177.6
  Top Layer w8: AIR_OSD_V1.24 5905.75,2505.75 5905.75,2521.75 5987.52,2603.52 FIL2.3
RXI2: AIR_OSD_V1.26 FIL1.1 | length 437.2
  Top Layer w8: 5850,2530 5850,2575 ; AIR_OSD_V1.26 5850,2650 5850,2575 ; FIL1.1 5982.31,2435.68 5967.31,2450.68 5911,2450.68 5883.31,2450.68 5850,2484 5850,2575
SPI_CLK: AIR_OSD_V1.36 U5.23 U14.6 | length 2059
  Top Layer w8: 4742,2339 4742,2418 ; U14.6 4749,2297 4742,2304 4742,2418 ; v1(4852,2840) 4848.87,2836.87 4848.87,2557 4818.87,2527 4763,2527 4742,2506 4742,2418 ; AIR_OSD_V1.36 5048,2852 5409,2852 5410,2853 5686,2853 5687,2852 ; 5728.38,2852 5687,2852 ; U5.23 5765.88,2623.37 5811,2668.49 5811,2808 5767,2852 5687,2852
  Bottom Layer w8: v1(4852,2840) 4934,2840 4994,2900 AIR_OSD_V1.36 ; AIR_OSD_V1.36@4986,2900 AIR_OSD_V1.36 ; AIR_OSD_V1.36@5008,2900 AIR_OSD_V1.36
SPI_MISO: AIR_OSD_V1.37 U5.9 U14.2 | length 1722.1
  Top Layer w8: v1@4867.5,2409.5 4880,2422 4880,2485 4925.93,2530.93 4925.93,2843.07 4900,2869 AIR_OSD_V1.37 4974,2826 5077,2826 5322,2826 5347,2801 5347,2741.62 5408.02,2680.59 5555.73,2680.59 5561,2675.32 5561,2621 5578.31,2603.68 U5.9
  Bottom Layer w8: v1(4612,2347) 4637,2322 4673.87,2322 4694.87,2343 4818,2343 4867,2392 v1(4867,2405)
SPI_MOSI: AIR_OSD_V1.38 U5.24 U14.5 | length 2069.1
  Top Layer w8: U14.5@4794,2250 4738,2250 4729,2259 4729,2596.47 4749,2616.47 4802.47,2616.47 4829,2643 4829,2871 AIR_OSD_V1.38 4854,2954 4928,2954 4950,2932 4950,2884.95 4993.95,2841 4995.95,2839 5427,2839 5428,2840 5680.62,2840 5681.62,2839 5749,2839 5788,2800 5788,2679.48 U5.24
SPI_NCS: AIR_OSD_V1.32 U5.8 | length 477.8
  Top Layer w8: v1(5367,2813) 5367,2747.25 5379,2735.25 5379,2734.67 5420.08,2693.59 5561.11,2693.59 5575.25,2679.45 5575.25,2633.82 5585.7,2623.37 U5.8
  Bottom Layer w8: v1(5367,2813) 5367,2867 AIR_OSD_V1.32
TELEM_RX: AIR_OSD_V1.12 FIL4.1 | length 1036.5
  Top Layer w8: AIR_OSD_V1.12 5171,1929 5998,1929 6019,1950 6019,1999 6015.45,2002.55 FIL4.1
TELEM_TX: AIR_OSD_V1.13 FIL4.3 | length 819.6
  Top Layer w8: AIR_OSD_V1.13 5254,1946 5949,1946 5972.9,1946 FIL4.3
TXO: AIR_OSD_V1.25 FIL2.1 | length 130.3
  Top Layer w8: AIR_OSD_V1.25 5907.63,2607.63 5907.63,2623.63 5964.69,2680.68 FIL2.1
TXO2: AIR_OSD_V1.22 FIL1.3 | length 157.6
  Top Layer w8: AIR_OSD_V1.22 5922,2300 5969,2347 5969,2367 ; 5969,2354 5969,2367 ; FIL1.3 5969,2379.8 5969,2367
UART5_TX: AIR_OSD_V1.34 U3.2 | length 455.9
  Top Layer w8: U3.2 5193,2499 5169.5,2522.5 5169.5,2743.5 5199,2773 v1(5199,2794)
  Bottom Layer w8: v1(5199,2794) 5203,2798 5203,2897 AIR_OSD_V1.34
VIDEO_IN: AIR_OSD_V1.53 P3.1 | length 648.4
  Top Layer w15: P3.1 3818,2055 3818,2229 3839.5,2250.5 4020.5,2250.5 4050.5,2280.5 4050.5,2350.5 AIR_OSD_V1.53
VIDEO_OUT: AIR_OSD_V1.50 P4.3 | length 167.4
  Top Layer w10: P4.3 3974,2400 AIR_OSD_V1.50
VIN+: AIR_OSD_V1.46 P19.2 | length 125
  Top Layer w30: P19.2 AIR_OSD_V1.46
pads on no net: AIR_OSD_V1.56 AIR_OSD_V1.57 P9.4 P9.5 P20.3 S1.A2 S1.B4 U1.6 U1.9 U2.4 U5.2 U5.3 U5.4 U5.5 U5.6 U5.7 U5.14 U5.15 U5.16 U5.17 U5.19 U5.21 U5.22 U12.6 U13.3 U13.5 U13.6 U13.7 U13.14 U13.15

## Polygon pours and split planes (outlines as drawn)
GND on Top Layer "Top Layer-No Net" (solid, remove dead copper, pour order 1000): 3844.79,2936.05 3843.8,2935.21 3843.8,1940.72 3844.79,1940.72 3871.42,1918.22 3876.36,1914.05 3925.68,1914.05 6225.22,1914.05 6264.68,1947.39 6266.66,1949.06 6266.66,2017.41 6266.66,2916.88 6244.95,2935.21
GND on Bottom Layer "Top Layer-No Net" (solid, remove dead copper, pour order 1001): 3829.69,2954.52 3828.7,2953.67 3828.7,1941.06 3829.69,1941.06 3856.34,1918.14 3861.27,1913.89 3910.62,1913.89 6211.14,1913.89 6250.62,1947.85 6252.59,1949.54 6252.59,2019.15 6252.59,2935 6230.88,2953.67

## Keep-outs
Keep-Out Layer:
  lines w10: 3781.55,2910.55 3851.55,2980.55 ; 6170.55,2980.45 6240.55,2910.45 ; 6170.55,2981 3850,2981 3781,2912 3781,1965 3851,1895 6171,1895 ; 6171,1894.45 6241,1964.45 6241,2910.45

## Silkscreen, mask and mechanical layers (free items; w line width, h text height)
Top Overlay:
  lines w5: 4120,2450 4135,2465 4483,2465 4485,2463 4485,2401 4482,2398 4150,2398 ; 4181,2352 4260,2352 4300,2312 4489,2312 4489,2388 4487,2390 4152,2390 ; 4334,2311 4334,2291 4386,2291 4387,2292 4387,2312 ; 4335,2467 4335,2487 ; 4336,2488 4388,2488 4388,2468 ; 4411,2311 4411,2291 4463,2291 ; 4411,2469 4411,2489 ; 4412,2490 4464,2490 4464,2470 ; 4464,2292 4464,2312 ; 4152,2390 4152,2390
  lines w10: 4256,2099 4299,2099 4299,2186 4300,2187 4256,2187 ; 4256,2220 4300,2220 4300,2310 ; 4256,2310 4298,2310
  lines w16: 5636,2249.3 5836,2249.3 ; 5787,2216.3 5836,2249.3 ; 5791,2281.3 5836,2249.3
  text "VIN+" at 3794,2922.91 h20 r270
  text "RST" at 6164,2905 h20
  text "GND" at 3794,2827 h20 r270
  text "BEC" at 4444,2826 h20
  text "PWM1" at 4538,2825 h20
  text "PWM2" at 4643,2825 h20
  text "PWM3" at 4744,2825 h20
  text "PWM4" at 4848.87,2825 h20
  text "USAR" at 5973,2825 h27
  text "AIR" at 4985,2824 h20
  text "FC" at 5105,2823 h20
  text "SWD" at 5225,2816.09 h27
  text "VDD" at 5328.07,2816.09 h20
  text "5V" at 6060,2810 h20 r270
  text "PWM" at 4348,2798 h20
  text "GND" at 5336,2788 h20
  text "PWR LED" at 4169,2769 h20 r270
  text "TX" at 6060,2762 h20 r270
  text "DIO" at 5338,2760 h20
  text "AUD1" at 3794,2743 h20 r270
  text "CLK" at 5338,2733 h20
  text "RX" at 6061,2711 h20 r270
  text "NRST" at 5340,2705 h20
  text "5V" at 4358,2656 h20
  text "AUD2" at 3794,2634 h20 r270
  text "GND" at 6087.72,2608 h20 r90
  text "GPS" at 6093.68,2561.76 h27
  text "GND" at 4352,2546 h20
  text "VIDO" at 3794,2522 h20 r270
  text "5V" at 6059,2509 h20 r270
  text "UBEC" at 4326,2494 h20
  text "P17" at 4418,2490 h20
  text "TX" at 6059,2464 h20 r270
  text "VIDO+VO" at 3794,2444 h20 r270
  text "SERVO_VDD" at 4140,2439 h20
  text "RX" at 6059,2418 h20 r270
  text "Option" at 4169,2408 h20
  text "5V Option" at 4158,2364 h20
  text "I2C" at 5373,2330 h20
  text "GND" at 3794,2309 h20 r270
  text "GND" at 5509,2306 h20 r270
  text "RC" at 4847,2296 h27 r270
  text "GND" at 6061,2282 h20 r270
  text "OSD" at 4335,2264 h20
  text "P17" at 4414,2263 h20
  text "SDA" at 5510,2243 h20 r270
  text "GND" at 3794,2232 h20 r270
  text "12V" at 4312,2221 h30
  text "GND" at 4842,2221 h20
  text "5V" at 4907,2221 h20
  text "RSSI" at 4951,2221 h20
  text "PPM" at 5022,2221 h20
  text "TX" at 5087,2221 h20
  text "5V" at 4512,2217.28 h20
  text "5V" at 4558,2217.28 h20
  text "I" at 4620,2217.28 h20
  text "V" at 4661,2217.28 h20
  text "GND" at 4701,2217.28 h20
  text "GND" at 4770,2217.28 h20
  text "SCL" at 5510,2182 h20 r270
  text "5V" at 4313,2160 h30
  text "VIDI+VO" at 3794,2157 h20 r270
  text "5V" at 6060,2132 h20 r270
  text "5V" at 5510,2128 h20 r270
  text "Camer" at 4310,2126 h20
  text "Power" at 4312,2100 h20
  text "PC15" at 5159,2087 h20
  text "PC5" at 5315,2087 h20
  text "TX" at 6061,2086 h20 r270
  text "Select" at 4293,2073 h20
  text "GND" at 5174,2060 h20
  text "5V" at 5315,2060 h20
  text "RX" at 6061,2039 h20 r270
  text "VIDI" at 3794,2038 h20 r270
  text "GND" at 6061,1990 h20 r270
  text "FligtSensor V1.0" at 4481,1914 h30
  text "2015/11/04" at 4867,1914 h20

## Text inside footprints (layer, text, board x,y; h text height)
AIR_OSD_V1: Top Overlay "PROG" at 5445,2805 h30
C6: Mechanical 2 ">NAME" at 6052,2747 h20 r180; Mechanical 4 ">VALUE" at 6059.5,2820 h20 r180
F2: Mechanical 2 ">Name" at 4548,2517 h24.8; Mechanical 4 ">Value" at 4548,2402 h24.8
F1001: Mechanical 2 ">Name" at 5967,2097 h24.8 r90; Mechanical 4 ">Value" at 6082,2097 h24.8 r90
S1: Mechanical 2 ">NAME" at 5956.07,2981 h20.4; Mechanical 4 ">VALUE" at 6063,2981 h20.4
U2: Mechanical 2 ">NAME" at 4072.82,2488 h20 r90; Mechanical 4 ">VALUE" at 4165.31,2485.5 h20 r90
U12: Mechanical 2 ">NAME" at 5575,2315.26 h20 r90; Mechanical 4 ">VALUE" at 5831.8,2315.26 h20 r90
U13: Mechanical 2 ">NAME" at 5764.06,2075 h20 r180; Mechanical 4 ">VALUE" at 5764.06,2240.36 h20 r180; Mechanical 16 "z" at 5730.59,2136 h20 r180; Mechanical 16 "x" at 5714.84,2163.78 h20; Mechanical 16 "y" at 5685,2135 h20 r180
U14: Mechanical 2 ">NAME" at 4628,2427 h17; Mechanical 4 ">VALUE" at 4628,2197 h17